# EAGLE board untitled (EAGLE 9.3.0)
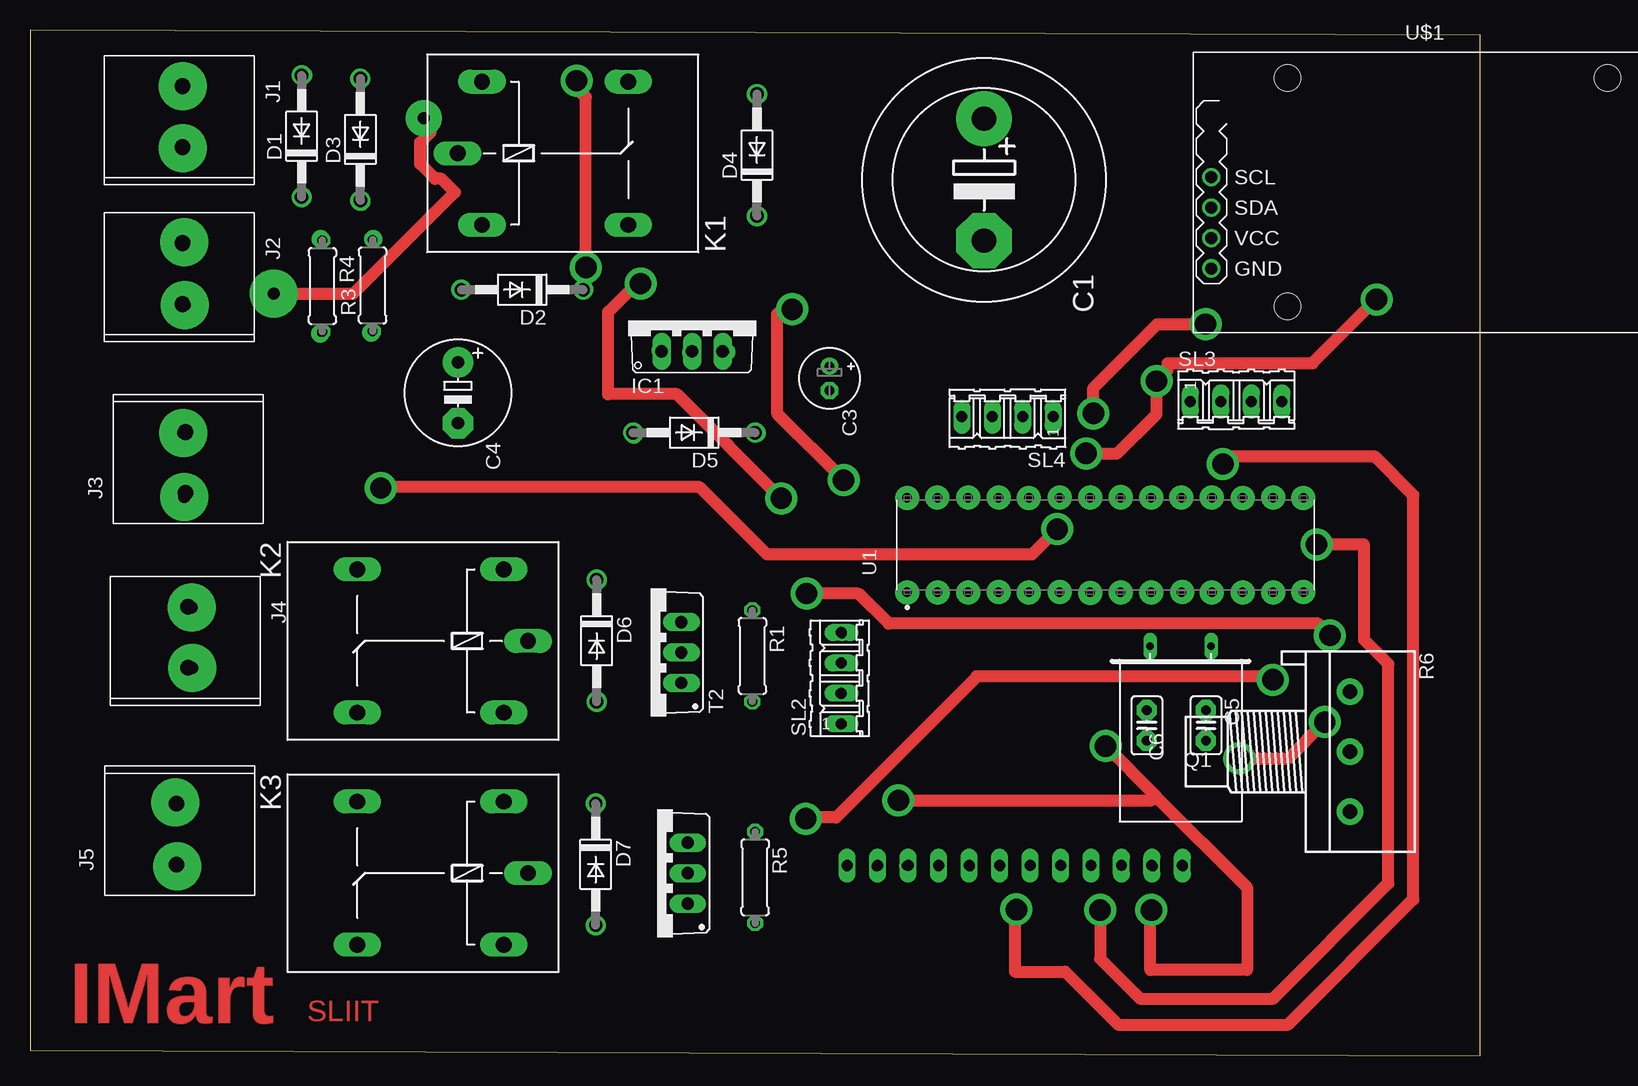
[diagram p0: board, top side]
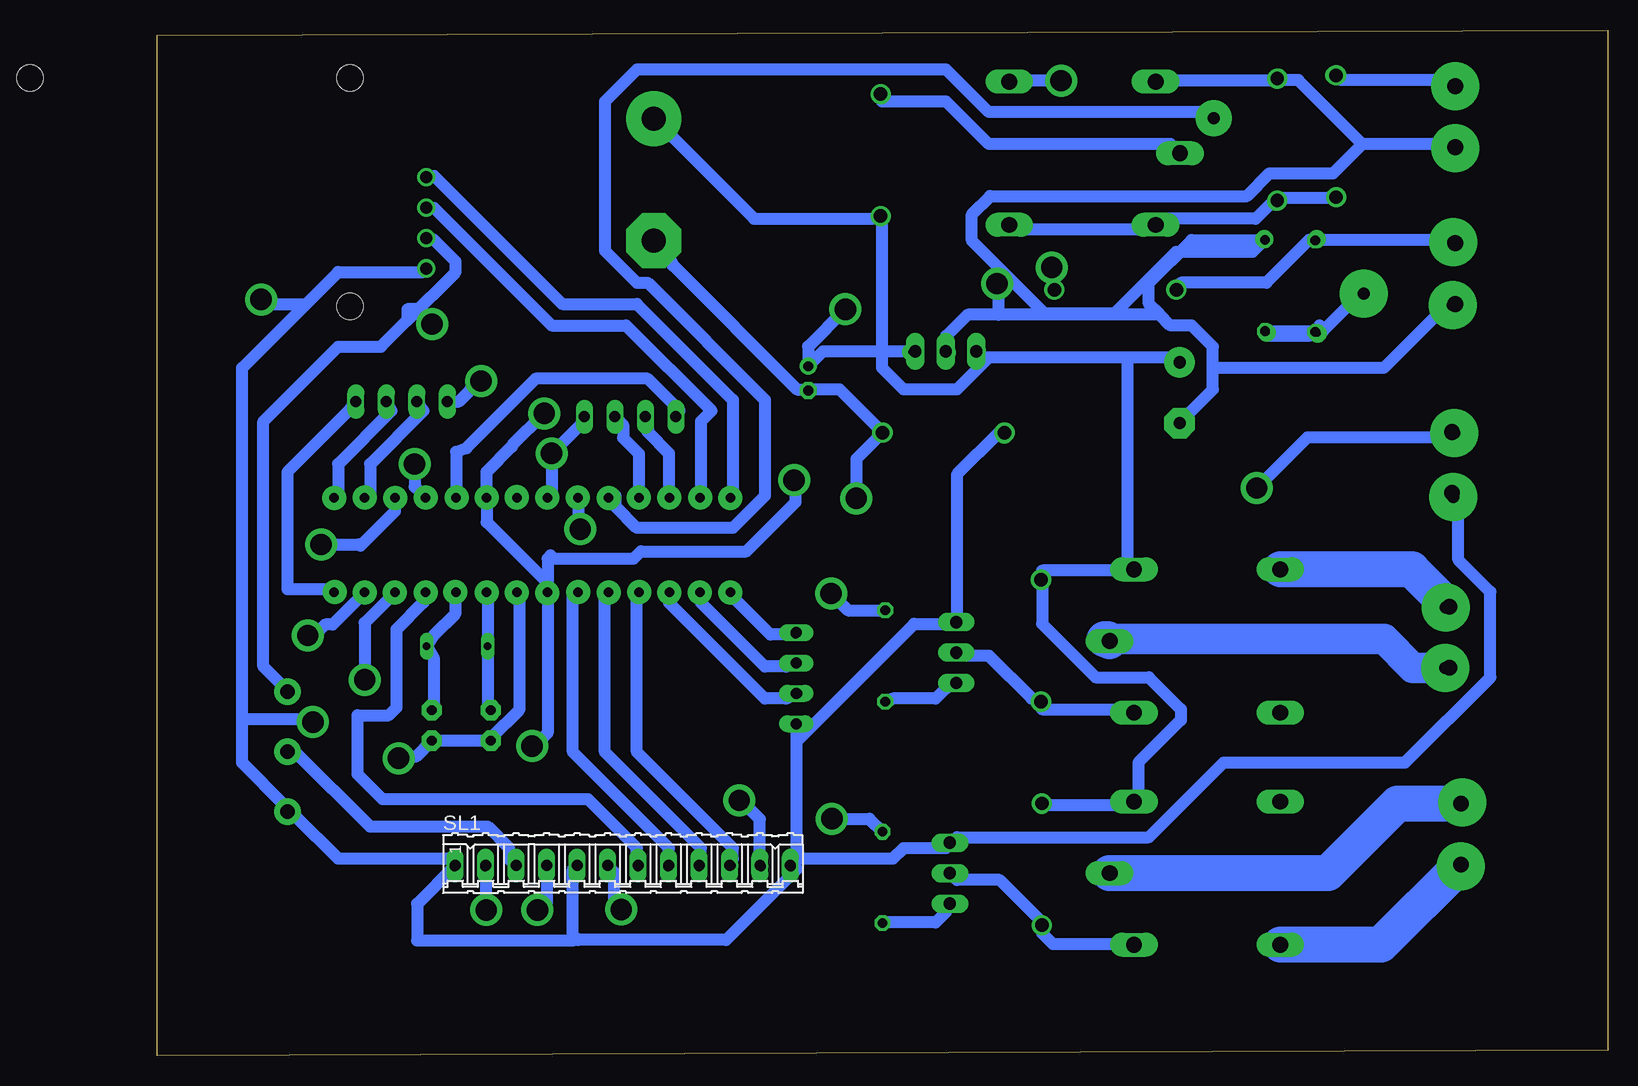
[diagram p1: board, bottom side, seen from below]

Size 120.85 x 85.51 mm. Coordinates in mm from the lower left corner, seen from the top.
Outline: 0,0.43 120.85,0 120.85,85.08 0,85.51 0,0.43
Copper layers (1*16): Top 0.035mm / dielectric 1.5mm / Bottom 0.035mm
Design rules "default *": minimum track width 40mil, minimum drill 0.35mm, track to track 30mil, track to pad 25mil, pad to pad 25mil, via to via 25mil, smd to smd 6mil, copper to edge 40mil, drill to drill 15mil, minimum pad ring 10mil, minimum via ring 8mil, stop-mask expansion 4mil, vias tented up to drill 0mil, thermal gap 10mil

## Footprints (pad centres in the part's own frame; a part is rotated, then mirrored left to right if it is on the bottom)
EB20D = drill 2.007 pad 4.597: + -5.08,0 | drill 2.007 pad 4.597 octagon: - 5.08,0
E2-5 = drill 0.813 pad 1.422: + -1.016,0 | drill 0.813 pad 1.422 octagon: - 1.016,0
E5-8,5 = drill 1.016 pad 2.54: + -2.54,0 | drill 1.016 pad 2.54 octagon: - 2.54,0
C025-025X050 = drill 0.813 pad 1.676 octagon: 1 -1.27,0; 2 1.27,0
DO41-10 = drill 1.118: A 5.08,0; C -5.08,0
TO220V = drill 1.016 long: 1 -2.54,-2.54; 2 0,-2.54; 3 2.54,-2.54
691201520002 = drill 1.3: 1 -2.54,0; 2 2.54,0
G5LE = drill 1.321 long: 1 -7.493,-5.969; 2 -7.493,5.969; O 4.699,5.969; P -9.525,0; S 4.699,-5.969
Q = drill 0.61 long: 1 -2.54,-7.62; 2 2.54,-7.62
0207/7 = drill 0.813 octagon: 1 -3.81,0; 2 3.81,0
3RP/1610N = drill 1.2 pad 2.184: 1 -5,0; 2 0,0; 3 5,0
12P = drill 0.914 long: 1 -13.97,0; 2 -11.43,0; 3 -8.89,0; 4 -6.35,0; 5 -3.81,0; 6 -1.27,0; 7 1.27,0; 8 3.81,0; 9 6.35,0; 10 8.89,0; 11 11.43,0; 12 13.97,0
04P = drill 0.914 long: 1 -3.81,0; 2 -1.27,0; 3 1.27,0; 4 3.81,0
TO220BV = drill 1.016 long: 1 -2.54,-2.54; 2 0,-2.54; 3 2.54,-2.54
DIP-28 = drill 0.79 pad 1.19 square: 1 -16.51,-3.95 | drill 0.79 pad 1.19: 2 -13.97,-3.95; 3 -11.43,-3.95; 4 -8.89,-3.95; 5 -6.35,-3.95; 6 -3.81,-3.95; 7 -1.27,-3.95; 8 1.27,-3.95; 9 3.81,-3.95; 10 6.35,-3.95; 11 8.89,-3.95; 12 11.43,-3.95; 13 13.97,-3.95; 14 16.51,-3.95; 15 16.51,3.95; 16 13.97,3.95; 17 11.43,3.95; 18 8.89,3.95; 19 6.35,3.95; 20 3.81,3.95; 21 1.27,3.95; 22 -1.27,3.95; 23 -3.81,3.95; 24 -6.35,3.95; 25 -8.89,3.95; 26 -11.43,3.95; 27 -13.97,3.95; 28 -16.51,3.95
RTC-DS3231-AT24C32 = drill 1: J1.3 -17.78,1.27; J1.4 -17.78,-1.27; J1.5 -17.78,-3.81; J1.6 -17.78,-6.35 | hole 2.2: -11.43,-9.525; -11.43,9.525; 15.24,9.525

## Placement (x,y rotation side)
C1  [EB20D]  79.5,73.02 270 top
C3  [E2-5]  66.62,56.46 270 top
C4  [E5-8,5]  35.66,55.27 270 top
C5  [C025-025X050]  97.99,27.53 270 top
C6  [C025-025X050]  93.07,27.53 270 top
D1  1N4004  [DO41-10]  22.63,76.66 90 top
D2  1N4004  [DO41-10]  41.02,63.86 180 top
D3  1N4004  [DO41-10]  27.53,76.38 90 top
D4  1N4004  [DO41-10]  60.58,75.08 90 top
D5  1N4004  [DO41-10]  55.35,51.94 180 top
D6  1N4004  [DO41-10]  47.22,34.59 270 top
D7  1N4004  [DO41-10]  47.14,15.95 270 top
IC1  788TV  [TO220V]  55.17,61.26 0 top
J1  [691201520002]  12.7,78.28 270 top
J2  [691201520002]  12.7,65.2 270 top
J3  [691201520002]  12.95,49.45 90 top
J4  [691201520002]  13.18,34.87 270 top
J5  [691201520002]  12.22,18.47 90 top
K1  G5L  [G5LE]  45.16,75.23 0 top
K2  G5L  [G5LE]  31.98,34.57 180 top
K3  G5L  [G5LE]  31.98,15.21 180 top
Q1  [Q]  95.89,26.52 180 top
R1  [0207/7]  60.2,33.32 270 top
R3  [0207/7]  28.55,64.21 90 top
R4  [0207/7]  24.36,64.16 270 top
R5  [0207/7]  60.43,14.86 270 top
R6  [3RP/1610N]  110.01,25.35 270 top
SL1  [12P]  82.07,15.85 0 bottom
SL2  [04P]  67.61,31.47 90 top
SL3  [04P]  100.51,54.53 0 top
SL4  [04P]  81.46,53.26 180 top
T1  2SC1306  [TO220BV]  52.27,15.21 90 top
T2  2SC1306  [TO220BV]  51.74,33.6 90 top
U1  ATMEGA328P-PU  [DIP-28]  89.61,42.57 0 top
U$1  RTC-DS3231-AT24C32  [RTC-DS3231-AT24C32]  116.23,71.98 0 top

## Library data of the parts
C1 C3-C6 R1 R3-R5 = adafruit
D1-D7 = diode
IC1 = linear
J1-J5 = Wurth_Elektronik_Electromechanic_Terminal_Blocks_Connectors_rev19b
K1-K3 = relay; OC_FARNELL: unknown; OC_NEWARK: unknown
Q1 = special
R6 = pot
SL1-SL4 = con-amp-quick; OC_FARNELL: unknown; OC_NEWARK: unknown
T1 T2 = transistor
U1 = Microcontroller; CREATED_BY: PCBLayout.com; DIGIKEY_PART_NUMBER: ATMEGA328P-PU-ND; MANUFACTURER: Microchip Technology; MPN: ATMEGA328P-PU; PACKAGE: DIP-28
U$1 = diy-modules

## Nets
N$1: D1.A J1.1
N$2: D2.A J2.1 R4.1
N$3: C1.- C3.- C4.- D3.A D5.C IC1.2 J1.2 J2.2 K1.2 R3.2
N$4: D2.C K1.O
N$5: D1.C D3.C K1.1 K1.S
N$6: D4.A K1.P
N$7: R5.1 U1.12
N$8: C3.+ IC1.3 R6.1 SL1.2 SL1.11 U1.7 U1.20 U$1.J1.5
N$9: C5.2 C6.2 D5.A J3.1 R6.3 SL1.1 SL1.5 SL1.12 SL2.1 SL3.1 SL4.1 T1.3 T2.3 U1.8 U1.22 U$1.J1.6
N$10: C6.1 Q1.2 U1.9
N$11: C5.1 Q1.1 U1.10
N$12: U1.28 U$1.J1.3
N$13: U1.27 U$1.J1.4
N$14: SL1.7 U1.11
N$15: R6.2 SL1.3
N$16: SL1.4 U1.17
N$17: SL1.6 U1.18
N$18: SL1.8 U1.6
N$19: SL1.9 U1.5
N$20: SL1.10 U1.4
N$21: J3.2 U1.23
N$22: J4.2 K2.P
N$23: J4.1 K2.S
N$24: R3.1 R4.2 U1.24
N$25: R1.1 U1.13
N$26: R1.2 T2.1
N$27: J5.2 K3.P
N$28: D6.A K2.2 T2.2
N$29: J5.1 K3.O
N$30: C1.+ C4.+ D4.C D6.C D7.C IC1.1 K2.1 K3.1
N$31: R5.2 T1.1
N$32: D7.A K3.2 T1.2
N$33: SL2.4 U1.1
N$34: SL2.3 U1.2
N$35: SL2.2 U1.3
N$36: SL3.4 U1.14
N$37: SL3.3 U1.15
N$38: SL3.2 U1.16
N$40: SL4.2 U1.25
N$41: SL4.3 U1.26
N$42: SL4.4 U1.19

## Tracks (layer width: path | path; a pad name or v marks a point on that pad's centre or on a via)
N$1
  Bottom 1.016: D1.A 22.23,81.33 13.34,81.33 J1.1
N$2
  Bottom 1.016: J2.1 13.34,68 24,68 R4.1 24.89,68 28.45,64.44 35.56,64.44 D2.A
N$3  (via drill 1.78 pad 0.38)
  Top 1.016: v62.61,46.46 53.92,55.14 48.18,55.14 48.18,62 50.55,64.36 v50.88,64.36
  Bottom 1.016: 66.67,55.55 64.01,55.55 60.45,51.99 D5.C 62.61,49.76 v62.61,46.46 | 66.67,55.55 67.56,55.55 77.92,65.9 78.3,66.74 C1.- | 66.67,55.55 C3.- | 37.34,61.77 36.45,60.88 34.67,60.88 32.89,59.11 32.89,57.33 | 37.34,61.77 38.23,62.66 38.23,64.44 34.67,68 28.45,68 R3.2 | 32.89,57.33 32.89,55.55 35.56,52.88 C4.- | 37.34,61.77 50.77,61.77 | 50.77,61.77 53.34,61.77 55.12,59.99 55.12,59.11 IC1.2 | 27.56,81.33 37.34,81.33 K1.2 | 11.91,75.74 J1.2 13.34,76 20.45,76 | 27.56,81.33 25.78,81.33 20.45,76 | 27.56,81.33 D3.A | 32.89,57.33 18.67,57.33 13.34,62.66 J2.2 | v50.88,64.36 50.77,64.26 50.77,61.77 | R3.2 28.42,68.02 | 20.45,76 22.89,73.56 28.16,73.56 30.05,71.67 51.47,71.67 52.98,70.15 52.98,67.94 46.92,61.87 41.1,61.87 35.98,67 29.59,67 28.57,68.02 R3.2
N$4  (via drill 1.78 pad 0.38)
  Top 1.016: v46.33,65.71 46.33,79.91 45.01,81.23 45.49,81.23 v45.54,81.28
  Bottom 1.016: D2.C 46.18,63.93 46.18,65.48 46.33,65.63 v46.33,65.71 | v45.54,81.28 49.78,81.28 K1.O
N$5
  Bottom 1.016: 27.56,71.55 23.11,71.55 D1.C | 27.56,71.55 29.34,69.77 37.34,69.77 K1.1 38.23,68.88 49.78,68.88 K1.S | 27.56,71.55 D3.C
N$6
  Bottom 1.016: D4.A 60.45,79.55 55.12,79.55 51.56,76 36.45,76 K1.P
N$7  (via drill 1.78 pad 0.38)
  Top 1.016: v103.58,31.34 103.3,31.62 78.89,31.62 78.92,31.6 67.18,19.86 65.08,19.86 64.97,19.76 v64.64,19.76
  Bottom 1.016: U1.12 103.58,36.08 v103.58,31.34 | v64.64,19.76 61.52,19.76 R5.1
N$8  (via drill 1.78 pad 0.38, 1.78 pad 0.65)
  Top 1.016: v89.64,25.81 93.81,21.63 | 93.81,21.63 101.42,14.02 101.42,7.14 93.37,7.14 93.37,11.79 93.45,11.86 v93.45,12.14 | v72.36,21.28 93.47,21.28 93.81,21.63 | v63.52,62.23 63.2,61.9 62.28,61.9 62.28,53.49 v67.79,47.98 | v88.62,53.54 88.62,55.68 93.93,60.99 v97.97,60.99
  Bottom 1.016: 100.03,61.32 102.23,59.11 105.79,59.11 112.01,52.88 112.01,32.44 110.24,30.66 R6.1 | 100.03,61.32 96.01,65.33 96.01,66.22 97.79,68 U$1.J1.5 | v89.64,25.81 89.53,25.81 89.2,26.14 89.1,26.14 88.34,26.9 U1.7 88.34,39.39 | v93.45,12.14 93.45,15.8 SL1.2 | SL1.11 70.64,19.74 72.42,21.51 72.42,21.34 v72.36,21.28 | 88.34,39.39 93.42,44.47 U1.20 93.42,48.67 91.31,50.78 91.31,50.85 v88.62,53.54 | 88.34,41.44 88.34,39.39 | 88.34,41.44 88.08,41.71 | v63.52,62.23 66.62,59.13 C3.+ 65.38,58.72 IC1.3 | 98.75,61.7 98.68,61.7 v97.97,60.99 99.21,62.23 100.03,62.23 100.03,61.32 | 88.34,41.44 81.17,41.44 80.57,42.04 71.78,42.04 67.67,46.15 67.67,47.95 67.77,47.95 v67.79,47.98
N$9  (via drill 1.78 pad 0.38)
  Top 1.016: v112.22,63.04 111.96,62.79 111.91,62.79 106.86,57.73 94.79,57.73 94.79,57.15 v93.88,56.24 93.88,53.49 90.6,50.22 v88.01,50.22 | v100.76,24.79 104.88,24.79 v107.9,27.81
  Bottom 1.016: 86.23,10.08 86.23,9.6 99.21,9.6 99.21,12.67 SL1.1 96.01,16.43 105.79,16.43 109.35,19.99 R6.3 110.24,20.88 113.79,24.43 113.79,28.04 | 86.23,10.08 86.23,14.66 | 86.23,14.66 86.23,15.54 SL1.5 86.23,14.66 | 108.46,62.66 113.79,57.33 113.79,28.04 | 108.46,62.66 105.79,65.33 98.68,65.33 U$1.J1.6 | D5.A 50.67,51.99 54.23,48.44 54.23,36.88 T2.3 55.12,35.99 57.78,35.99 67.56,26.21 | 67.56,16.43 67.56,26.21 | 67.56,26.21 67.56,27.1 SL2.1 | 67.56,16.43 59.56,16.43 58.67,17.32 55.12,17.32 T1.3 54.23,18.21 38.23,18.21 32,24.43 16.89,24.43 9.78,31.55 9.78,38.66 12.45,41.33 12.45,46.66 J3.1 | 67.56,16.43 SL1.12 67.56,15.54 73.46,9.65 85.8,9.65 86.23,10.08 | U1.8 90.68,38.66 90.68,28.88 93.05,26.51 C6.2 98.06,26.26 98.09,26.09 C5.2 99.34,24.92 100.43,24.92 100.56,24.79 v100.76,24.79 | U1.22 88.29,46.52 88.01,46.64 v88.01,50.22 85.34,52.88 SL4.1 | SL3.1 95.71,54.53 94.06,56.18 93.93,56.18 v93.88,56.24 | v112.22,63.04 111.84,62.66 108.46,62.66 | v107.9,27.81 108.13,28.04 113.79,28.04
N$10
  Bottom 1.016: U1.9 93.34,38.66 Q1.2 93.34,28.98 C6.1
N$11
  Bottom 1.016: C5.1 97.79,29.28 97.79,33.08 Q1.1 97.77,35.13 96.01,36.88 96.01,38.66 U1.10
N$12
  Bottom 1.016: U1.28 72.9,46.66 72.9,54.66 80.9,62.66 87.12,62.66 97.79,73.33 U$1.J1.3
N$13
  Bottom 1.016: U1.27 75.56,46.66 75.56,52.88 74.68,53.77 81.79,60.88 88.01,60.88 97.79,70.66 U$1.J1.4
N$14
  Bottom 1.016: U1.11 98.68,38.66 98.68,37.77 100.91,35.53 100.91,29.03 101.58,28.37 104.17,28.37 104.17,23.47 102.08,21.39 84.96,21.39 80.9,17.32 80.9,16.43 SL1.7
N$15
  Bottom 1.016: SL1.3 91.57,16.43 91.57,17.32 93.34,19.1 103.12,19.1 109.35,25.32 R6.2
N$16  (via drill 1.78 pad 0.38)
  Top 1.016: v89.18,12.14 89.18,8.08 92.51,4.75 103.61,4.75 113.21,14.35 113.21,32.64 111.18,34.67 111.18,42.57 111.12,42.62 v107.21,42.62
  Bottom 1.016: SL1.4 88.42,12.65 89.18,11.89 v89.18,12.14 | v107.21,42.62 104.06,42.62 103.94,42.49 101.04,45.39 U1.17
N$17  (via drill 1.78 pad 0.38)
  Top 1.016: v82.19,12.19 82.07,12.06 82.07,7.01 86.26,7.01 90.68,2.59 104.85,2.59 115.29,13.03 115.29,46.74 112.09,49.94 99.39,49.94 99.26,49.81 99.26,49.48 v99.42,49.33
  Bottom 1.016: SL1.6 82.8,15.32 82.8,12.93 82.19,12.32 v82.19,12.19 | v99.42,49.33 99.42,47.43 U1.18
N$18
  Bottom 1.016: U1.6 86.23,38.66 86.23,25.32 78.23,17.32 78.23,16.43 SL1.8
N$19
  Bottom 1.016: U1.5 83.57,38.66 83.57,25.32 75.56,17.32 75.56,16.43 SL1.9
N$20
  Bottom 1.016: U1.4 80.9,38.66 80.9,25.32 72.9,17.32 72.9,16.43 SL1.10
N$21  (via drill 1.78 pad 0.38)
  Top 1.016: v85.61,43.9 83.5,41.78 61.42,41.78 55.8,47.4 29.31,47.4 v29.23,47.32
  Bottom 1.016: U1.23 85.8,44.45 85.61,44.26 v85.61,43.9 | v29.23,47.32 24.99,51.56 12.52,51.56 | 12.39,51.56 12.52,51.56 | 12.52,51.56 J3.2
N$22
  Bottom 2.54: J4.2 16.23,32.33 18.62,34.72 41.66,34.72
  Bottom 3: 41.91,34.72 41.66,34.72 K2.P
N$23
  Bottom 3: J4.1 16.31,40.54 K2.S
N$24  (via drill 1 pad 3, 1 pad 4)
  Top 1.016: v20.31,63.51 26.93,63.51 35.4,71.98 34.28,73.1 33.76,73.1 32.51,74.35 32.51,76.12 33.38,76.99 33.38,78.31 32.95,78.31 v32.81,78.17
  Bottom 1.016: U1.24 82.68,46.66 82.68,45.77 80.9,43.99 72.9,43.99 70.23,46.66 70.23,54.66 80.01,64.44 80.9,64.44 83.57,67.11 83.57,79.55 80.9,82.22 55.12,82.22 51.56,78.66 33.3,78.66 v32.81,78.17 | 24,60.88 R4.2 24.89,59.99 28.45,59.99 R3.1 23.74,60.4 20.63,63.51 v20.31,63.51
N$25  (via drill 1.78 pad 0.38)
  Top 1.016: v108.33,35.03 107.34,36.02 71.55,36.02 69.04,38.53 v64.72,38.53 64.67,38.48
  Bottom 1.016: U1.13 106.26,35.94 106.88,35.94 107.8,35.03 v108.33,35.03 | v64.72,38.53 63.32,37.13 R1.1
N$26
  Bottom 1.016: R1.2 59.56,29.77 56.01,29.77 55.12,30.66 T2.1
N$27
  Bottom 3: J5.2 17.53,21.01 23.32,15.21 K3.P
N$28
  Bottom 1.016: T2.2 54.23,33.32 51.56,33.32 48.01,29.77 D6.A 47.12,28.88 40.01,28.88 K2.2
N$29
  Bottom 3: J5.1 18.9,9.25 K3.O
N$30
  Bottom 1.016: C1.+ 79.12,77.77 71.12,69.77 61.34,69.77 D4.C 60.45,69.77 60.45,57.33 58.67,55.55 54.23,55.55 51.56,58.22 | 40.01,58.22 36.45,58.22 C4.+ | 40.01,58.22 51.56,58.22 | 51.56,58.22 52.45,58.22 IC1.1 | D7.C 47.12,20.88 40.01,20.88 K3.1 39.12,21.77 39.12,24.43 35.56,27.99 35.56,28.88 38.23,31.55 42.67,31.55 47.12,35.99 47.12,39.55 D6.C 47.12,40.44 40.01,40.44 K2.1 40.01,41.33 40.01,58.22
N$31
  Bottom 1.016: R5.2 60.45,11.1 56.01,11.1 55.12,11.99 T1.1
N$32
  Bottom 1.016: T1.2 54.23,14.66 50.67,14.66 47.12,11.1 D7.A 47.12,10.21 46.23,9.32 40.01,9.32 K3.2
N$33
  Bottom 1.016: U1.1 73.1,38.43 69.77,35.1 68.45,35.1 SL2.4
N$34
  Bottom 1.016: U1.2 75.56,38.66 75.56,37.77 70.23,32.44 68.45,32.44 SL2.3
N$35
  Bottom 1.016: U1.3 78.23,38.66 78.23,37.77 70.23,29.77 68.45,29.77 SL2.2
N$36
  Bottom 1.016: SL3.4 104.9,53.77 110.03,48.64 110.03,38.89 106.39,38.89 U1.14
N$37
  Bottom 1.016: U1.15 105.79,46.66 105.79,49.33 101.35,53.77 SL3.3
N$38
  Bottom 1.016: U1.16 103.12,46.66 103.12,49.33 98.68,53.77 SL3.2
N$39  (via drill 0.55 pad 2)
  other vias: 106.09,38.64
N$40
  Bottom 1.016: SL4.2 82.04,52.58 82.04,51.51 80.72,50.19 U1.25
N$41
  Bottom 1.016: U1.26 78.23,46.57 78.23,50.22 80.01,51.99 80.01,52.88 SL4.3
N$42
  Bottom 1.016: U1.19 95.96,50.35 95.12,50.65 89.33,56.44 80.01,56.44 77.34,53.77 SL4.4
N$43  (via drill 0.8 pad 1.1)
  other vias: 96.09,15.78
N$44  (via drill 0.8 pad 1.1)
  other vias: 93.56,15.78
N$45  (via drill 0.8 pad 1.1)
  other vias: 90.98,15.86
N$46  (via drill 0.8 pad 1.1)
  other vias: 88.43,15.83
N$47  (via drill 0.8 pad 1.1)
  other vias: 85.9,15.81
N$48  (via drill 0.8 pad 1.1)
  other vias: 83.33,15.8
N$49  (via drill 0.8 pad 1.1)
  other vias: 80.82,15.78
N$50  (via drill 0.8 pad 1.1)
  other vias: 78.31,15.77
N$51  (via drill 0.8 pad 1.1)
  other vias: 75.72,15.78
N$52  (via drill 0.8 pad 1.1)
  other vias: 73.06,15.83
N$53  (via drill 0.8 pad 1.1)
  other vias: 70.55,15.78
N$54  (via drill 0.8 pad 1.1)
  other vias: 68.07,15.76
N$55  (via drill 0.8 pad 1.1)
  other vias: 67.67,27.62
N$56  (via drill 0.8 pad 1.1)
  other vias: 67.5,30.2
N$57  (via drill 0.8 pad 1.1)
  other vias: 67.62,32.68
N$58  (via drill 0.8 pad 1.1)
  other vias: 67.67,35.18
N$59  (via drill 0.8 pad 1.1)
  other vias: 54.82,17.69
N$60  (via drill 0.8 pad 1.1)
  other vias: 54.84,15.16
N$61  (via drill 0.8 pad 1.1)
  other vias: 54.88,12.62
N$62  (via drill 0.8 pad 1.1)
  other vias: 54.31,31.01
N$63  (via drill 0.8 pad 1.1)
  other vias: 54.29,33.47
N$64  (via drill 0.8 pad 1.1)
  other vias: 54.25,36.05
N$65  (via drill 0.8 pad 1.1)
  other vias: 77.64,53.28
N$66  (via drill 0.8 pad 1.1)
  other vias: 80.21,53.28
N$67  (via drill 0.8 pad 1.1)
  other vias: 82.72,53.25
N$68  (via drill 0.8 pad 1.1)
  other vias: 85.27,53.25
N$69  (via drill 0.8 pad 1.1)
  other vias: 96.72,54.48
N$70  (via drill 0.8 pad 1.1)
  other vias: 99.21,54.52
N$71  (via drill 0.8 pad 1.1)
  other vias: 101.78,54.54
N$72  (via drill 0.8 pad 1.1)
  other vias: 104.32,54.54
N$73  (via drill 0.55 pad 2)
  other vias: 106.12,46.51
N$74  (via drill 0.55 pad 2)
  other vias: 103.59,46.53
N$75  (via drill 0.55 pad 2)
  other vias: 101.05,46.51
N$76  (via drill 0.55 pad 2)
  other vias: 98.5,46.52
N$77  (via drill 0.55 pad 2)
  other vias: 95.92,46.55
N$78  (via drill 0.55 pad 2)
  other vias: 93.42,46.51
N$79  (via drill 0.55 pad 2)
  other vias: 90.9,46.57
N$80  (via drill 0.55 pad 2)
  other vias: 90.92,46.54
N$81  (via drill 0.55 pad 2)
  other vias: 88.36,46.52
N$82  (via drill 0.55 pad 2)
  other vias: 85.81,46.55
N$83  (via drill 0.55 pad 2)
  other vias: 83.25,46.49
N$84  (via drill 0.55 pad 2)
  other vias: 80.73,46.54
N$85  (via drill 0.55 pad 2)
  other vias: 78.18,46.52
N$86  (via drill 0.55 pad 2)
  other vias: 75.62,46.51
N$87  (via drill 0.55 pad 2)
  other vias: 73.1,46.51
N$88  (via drill 0.55 pad 2)
  other vias: 73.1,38.62
N$89  (via drill 0.55 pad 2)
  other vias: 75.65,38.61
N$90  (via drill 0.55 pad 2)
  other vias: 78.2,38.63
N$91  (via drill 0.55 pad 2)
  other vias: 80.72,38.65
N$92  (via drill 0.55 pad 2)
  other vias: 83.23,38.63
N$93  (via drill 0.55 pad 2)
  other vias: 85.79,38.64
N$94  (via drill 0.55 pad 2)
  other vias: 88.36,38.58
N$95  (via drill 0.55 pad 2)
  other vias: 90.89,38.6
N$96  (via drill 0.55 pad 2)
  other vias: 93.42,38.62
N$97  (via drill 0.55 pad 2)
  other vias: 96.03,38.66
N$98  (via drill 0.55 pad 2)
  other vias: 98.49,38.63
N$99  (via drill 0.55 pad 2)
  other vias: 101.07,38.62
N$100  (via drill 0.55 pad 2)
  other vias: 103.59,38.63
N$101  (via drill 0.55 pad 1)
  other vias: 98.46,73.27
N$102  (via drill 0.55 pad 1)
  other vias: 98.46,70.65
N$103  (via drill 0.55 pad 1)
  other vias: 98.49,68.12
N$104  (via drill 0.55 pad 1)
  other vias: 98.47,65.61
N$105  (via drill 0.55 pad 1)
  other vias: 60.24,37.1
N$106  (via drill 1 pad 4)
  other vias: 12.71,80.84
N$107  (via drill 1 pad 4)
  other vias: 12.71,75.67
N$108  (via drill 1 pad 4)
  other vias: 12.86,67.84
N$109  (via drill 1 pad 4)
  other vias: 12.92,62.56
N$110  (via drill 1 pad 4)
  other vias: 12.78,51.9
N$111  (via drill 1 pad 4)
  other vias: 12.86,46.57
N$112  (via drill 1 pad 4)
  other vias: 13.49,37.36
N$113  (via drill 1 pad 4)
  other vias: 13.54,32.31
N$114  (via drill 1 pad 4)
  other vias: 12.12,21.1
N$115  (via drill 1 pad 4)
  other vias: 12.26,15.77
N$116  (via drill 0.5 pad 1.5)
  other vias: 22.78,81.73
N$117  (via drill 0.5 pad 1.5)
  other vias: 22.63,71.49
N$118  (via drill 0.5 pad 1.5)
  other vias: 27.62,71.19
N$119  (via drill 0.5 pad 1.5)
  other vias: 32.76,78.03
N$120  (via drill 0.5 pad 1.5)
  other vias: 37.71,81.13
N$121  (via drill 0.5 pad 1.5)
  other vias: 27.47,81.53
N$122  (via drill 0.5 pad 1.5)
  other vias: 50.05,81.28
N$123  (via drill 0.5 pad 1.5)
  other vias: 49.75,69.34
N$124  (via drill 0.5 pad 1.5)
  other vias: 37.46,69.29
N$125  (via drill 0.5 pad 1.5)
  other vias: 35.61,57.65
N$126  (via drill 0.5 pad 1.5)
  other vias: 35.81,52.75
N$127  (via drill 0.5 pad 1.5)
  other vias: 28.42,60.29
N$128  (via drill 0.5 pad 1.5)
  other vias: 24.17,60.19
N$129  (via drill 0.5 pad 1.5)
  other vias: 24.22,68.09
N$130  (via drill 0.5 pad 1.5)
  other vias: 28.62,68.09
N$131  (via drill 0.5 pad 1.5)
  other vias: 27.4,40.56
N$132  (via drill 0.5 pad 1.5)
  other vias: 39.5,40.62
N$133  (via drill 0.5 pad 1.5)
  other vias: 41.78,34.62
N$134  (via drill 0.5 pad 1.5)
  other vias: 39.39,28.62
N$135  (via drill 0.5 pad 1.5)
  other vias: 39.41,21.22
N$136  (via drill 0.5 pad 1.5)
  other vias: 41.75,15.22
N$137  (via drill 0.5 pad 1.5)
  other vias: 39.51,9.13
N$138  (via drill 0.5 pad 1.5)
  other vias: 27.12,9.08
N$139  (via drill 0.5 pad 1.5)
  other vias: 47.2,10.88
N$140  (via drill 0.5 pad 1.5)
  other vias: 47.15,20.92
N$141  (via drill 0.5 pad 1.5)
  other vias: 50.3,51.78
N$142  (via drill 0.5 pad 1.5)
  other vias: 60.55,51.9
N$143  (via drill 0.5 pad 1.5)
  other vias: 52.57,58.8
N$144  (via drill 0.5 pad 1.5)
  other vias: 55.09,58.62
N$145  (via drill 0.5 pad 1.5)
  other vias: 58.03,58.68
N$146  (via drill 0.5 pad 1.5)
  other vias: 79.55,78.17
N$147  (via drill 0.5 pad 1.5)
  other vias: 79.61,67.91
N$148  (via drill 0.5 pad 1.5)
  other vias: 60.53,69.94
N$149  (via drill 0.5 pad 1.5)
  other vias: 112.21,63.06

## Text on the board
Top: IMart | SLIIT